# Altium PCB AccelerometerLayout.PcbDoc
Units mil, origin at the board's own origin, x right, y up, seen from the top; angles counter-clockwise.
Board outline 800 x 680 mil, 2 copper layers (Top Layer, Bottom Layer); 9 components, 5 nets, 30 pads, 4 vias.
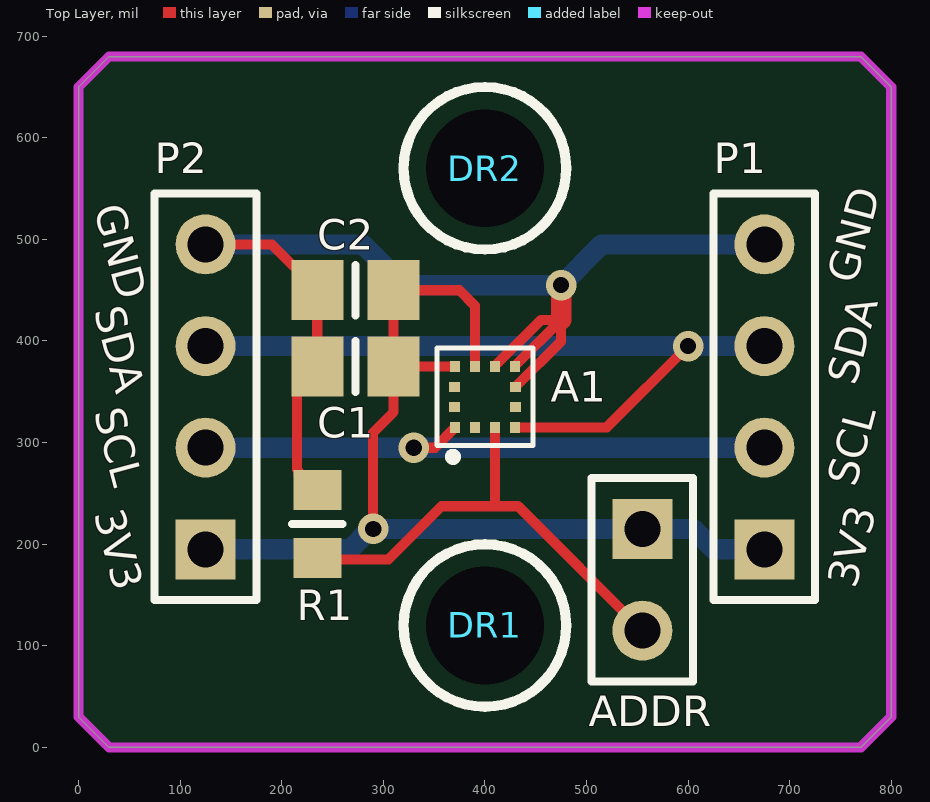
[diagram p0: Top Layer view]
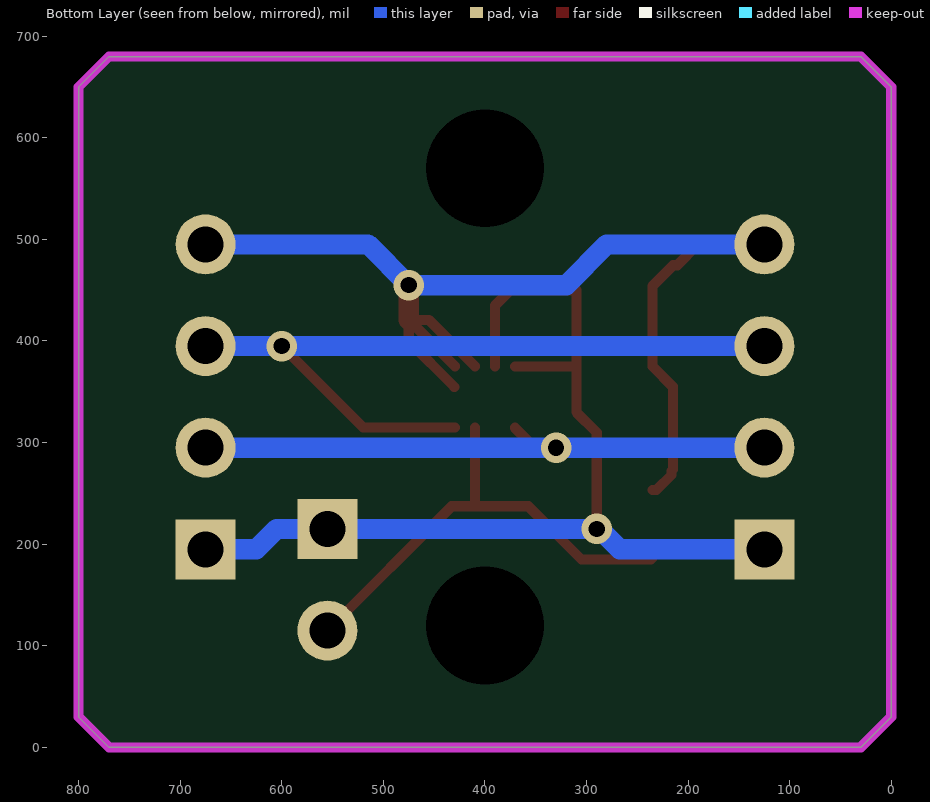
[diagram p1: Bottom Layer view, seen from below]

## Layer stack, top to bottom
Top Solder: solder mask 0.4, Solder Resist, Dk 3.5
Top Layer: signal copper 1.4
Dielectric 1: dielectric 12.6, FR-4, Dk 4.8
Bottom Layer: signal copper 1.4
Bottom Solder: solder mask 0.4, Solder Resist, Dk 3.5

## Board outline
30,0 0,30 0,650 30,680 770,680 800,650 800,30 770,0

## Design rules (kind name [scope] priority, off if disabled: settings)
Clearance "Clearance~Sunstone Circuits" [All] p1: gap=6 ignorepadtopadclearanceinfootprint=FALSE except(0: Arc-Hole Track-Hole SMDPad-Hole THPad-Hole Via-Hole Fill-Hole Poly-Hole Region-Hole Text-Hole) // Sunstone Circuits Minimum Clearance Rule (Double Sided)
HoleSize "HoleSize~Sunstone Circuits" [All] p1: absolutevalues=TRUE maxlimit=251 minlimit=16 maxpercent=80.000 minpercent=20.000 // SSC Hole Size Rule For Single Sided & Double Sided Designs.
HoleSize Testpoint [All] p2: absolutevalues=TRUE maxlimit=100 minlimit=1 maxpercent=80.000 minpercent=20.000
HoleSize TestPointUsage [All] p3: absolutevalues=TRUE maxlimit=100 minlimit=1 maxpercent=80.000 minpercent=20.000
MinimumAnnularRing "MinimumAnnularRing~Sunstone Circuits" [All] p1: minimumring=7 // Sunstone Circuits Minimum Annular Ring (Double Sided)
MinimumSolderMaskSliver [All] p1: minsoldermaskwidth=2
PlaneClearance "PlaneClearance~Sunstone Circuits" [All] p1: clearance=12 // Sunstone Circuits Power Plane Clearance Rule (Double Sided)
PlaneConnect "PlaneConnect~Sunstone Circuits" [All] p1: planeconnectstyle=Relief reliefexpansion=10 reliefentries=4 reliefconductorwidth=8 reliefairgap=10 // Sunstone Circuits Power Plane Connect Rule (Double Sided)
PolygonConnect "PolygonConnect~Sunstone Circuits" [All] p1: connectstyle=Relief reliefconductorwidth=8 reliefentries=4 polygonreliefangle="90 Angle" airgapwidth=10 // Sunstone Circuits Polygon Connect Style (Double Sided)
RoutingVias "RoutingVias~Sunstone Circuits" [All] p1: holewidth=16 width=30 viastyle="Through Hole" minholewidth=16 minwidth=30 maxholewidth=20 maxwidth=40 // Sunstone Circuits Routing Vias Rule (Double Sided)
ShortCircuit "ShortCircuit~Sunstone Circuits" [All] p1: allowed=FALSE // Sunstone Circuits Short Circuit Rule~Do Not Allow (Double Sided)
SilkToSilkClearance [All] p1: silktosilkclearance=1
SilkToSolderMaskClearance [IsPad] p1: minsilkscreentomaskgap=3 clearancetoexposedcopper=TRUE
SolderMaskExpansion "SolderMaskExpansion~Sunstone Circuits" [All] p1: expansion=3 // Sunstone Circuits Solder Mask Expansion Rule (Double Sided)
ViasUnderSMD "ViasUnderSMD~Sunstone Circuits" [All] p1: allowed=FALSE // Sunstone Circuits Vias Under SMD~Do Not Allow (Double Sided)
Width "Width~Sunstone Circuits" [All] p1: maxlimit=100 minlimit=6 preferedwidth=10 // Sunstone Circuits Minimum Width Rule (Double Sided)
23 further rules are at their usual default settings.

## Components (designator, comment, footprint, x,y, rotation, side; value= is the part's Value field where it differs from the comment)
A1 "KX003-1077" *XDCR_KX003-1077 400,345 r90 top
ADDR "90120-0122" HDR1X2 555,215 r270 top (schematic designator P3)
C1 ".1uF" 0805 272.4,375 r0 top
C2 ".1uF" 0805 272.6,450 r0 top
DR1 "4-40 DRILL HOLE" "4_40 DRILL HOLE" 400,120 r0 top
DR2 "4-40 DRILL HOLE" "4_40 DRILL HOLE" 400,570 r0 top
P1 "90120-0124" HDR1X4 675,195 r90 top
P2 "90120-0124" HDR1X4 125,195 r90 top
R1 "10k" 0805_RES_HD 235,220 r270 top (schematic designator R2)

## Footprints (in the part's own frame and the unit in brackets; to place one, negate y for a bottom-side part, rotate by r counter-clockwise, add the part's x,y. Pads: shape width x height; smd on the part's side, far side on the other; paste and mask are expansions set on the pad)
"4_40 DRILL HOLE" [mil]
  round 100 hole 116: 1(0,0)
  silkscreen extent -80,-80 80,80
0805 [mm] "Chip Capacitor; Body 2.0 x 1.2 mm (LxW typ)"
  rect 1.3x1.5 smd: 1(-0.95,0) 2(0.95,0)
  silkscreen extent 0,-0.64 0,0.64, body extent -1,-0.6 1,0.6, height 1.5
0805_RES_HD [mm] "Chip Resistor, 2-Leads, Body 2.00x1.25mm, IPC High Density"
  rect 1x1.2 smd: 1(-0.85,0) 2(0.85,0)
  silkscreen extent 0,-0.64 0,0.64, body extent -1.1,-0.68 1.1,0.67, height 0.65
*XDCR_KX003-1077 [mm]
  rect 0.275x0.25 smd: 1(-0.763,0.75) 2(-0.763,0.25) 3(-0.763,-0.25) 4(-0.763,-0.75) 7(0.763,-0.75) 8(0.763,-0.25) 9(0.763,0.25) 10(0.763,0.75)
  rect 0.25x0.275 smd: 5(-0.25,-0.763) 6(0.25,-0.763) 11(0.25,0.763) 12(-0.25,0.763)
  silkscreen extent -1.6,-1.2 1.22,1.2
HDR1X2 [mm] "Connector; Header; 2 Position"
  rect 1.5x1.5 hole 0.9: 1(0,0)
  round 1.5 hole 0.9: 2(2.54,0)
  silkscreen extent -1.27,-1.27 3.81,1.27
HDR1X4 [mm] "Connector; Header; 4 Position"
  rect 1.5x1.5 hole 0.9: 1(0,0)
  round 1.5 hole 0.9: 2(2.54,0) 3(5.08,0) 4(7.62,0)
  silkscreen extent -1.27,-1.27 8.89,1.27, body extent -1.27,-1.27 8.89,1.27, height 9.32

## Part data
A1: "Accelerometer X, Y, Z Axis ±2g, 4g, 8g, 16g 3.5kHz _X,Y_, 1.8kHz _Z_ 12-LGA _2x2_", Package="VFLGA-12 Rohm Semiconductor", Digi-Key_Part_Number=KX003-1077CT-ND, Digi-Key_Purchase_URL=https://www.digikey.com/product-detail/en/rohm-semiconductor/KX003-1077/KX003-1077CT-ND/9679234?utm_source=snapeda&utm_medium=aggregator&utm_campaign=symbol, MF="Rohm Semiconductor", MP=KX003-1077, SnapEDA_Link=https://www.snapeda.com/parts/KX003-1077/Rohm/view-part/3603894/?ref=snap
ADDR: "MOLEX CONN HEADER 2POS .100\" STR TIN", Manufacturer 1=Molex, Supplier Part Number 1=WM8072-ND, GFUPartNo=90120-0122, Manufacturer Part Number 1=90120-0122, Part Type=THRU, Supplier 1=Digi-Key
C1 C2: library part CL21A475KPFNNNE, ".1, 10%, 50V", Manufacturer 1=Samsung, Supplier Part Number 1=1276-1259-1-ND, GFUPartNo=CL21A475KPFNNNE, Manufacturer Part Number 1=CL21A475KPFNNNE, PackageReference=0805, Part Type=SMT, Supplier 1=Digi-Key
DR1 DR2: library part "4_40 DRILL HOLE", "Mounting hole for 4-40 screw, non-BOM", Manufacturer 1=N/A, GFUPartNo="4_40 DRILL HOLE", Manufacturer Part Number 1=N/A
P1 P2: "CONN HEADER 4POS .100\" STR TIN", Manufacturer 1=Molex, Supplier Part Number 1=WM8074-ND, GFUPartNo=90120-0124, Manufacturer Part Number 1=90120-0124, Part Type=THRU, Supplier 1=Digi-Key
R1: library part RC2012F752CS, "RES 10K OHM 1/8W 5% 0805", Manufacturer 1=Samsung, Supplier Part Number 1=1276-5324-1-ND, GFUPartNo=RC2012F752CS, Manufacturer Part Number 1=RC2012F752CS, Part Type=SMT, Supplier 1=Digi-Key

## Via types
v1: diameter 30, hole 16, Top Layer to Bottom Layer, 4 vias

## Nets (pads, with @x,y where several pads share a name; then routed paths per layer and width w, separated by ;. In a path a pad name is that pad's centre, name@x,y a point inside that pad or via, vN(x,y) a via of type N, cw(c..) or ccw(c..) an arc to the next point about the centre after c; other vN are vias at no path point)
3V3: A1.9 A1.10 ADDR.1 C1.2 C2.2 P1.1 P2.1 | length 1020.5
  Top Layer w10: v1(290,215) 290,310 310,330 310,374.8 C1.2 ; A1.10 C1.2 ; A1.9 390.16,434.84 375,450 C2.2 310,375.2 C1.2 ; P1.1@670,195 P1.1@672.5,197.5
  Bottom Layer w20: P2.1 267.29,195 287.29,215 v1(290,215) ADDR.1 605,215 625,195 P1.1
GND: A1.6 A1.7 A1.8 C1.1 C2.1 P1.4 P2.4 R1.1 | length 1201.3
  Top Layer w10: P2.4 190.2,495 210.67,474.53 214.61,474.53 235.2,453.94 C2.1 235,449.8 C1.1 215,355 215,273.46 216.38,272.09 216.38,268.15 231.06,253.46 R1.1 ; A1.8 409.84,375.35 455.31,420.83 475,420.83 ; A1.7 429.53,375.35 475,420.83 ; A1.6 430.35,354.84 430.43,354.92 430.43,355.26 475,399.82 475,420.83
  Top Layer w20: 475,420.83 v1(475,455) ; P1.4 P1.4@677.5,497.5
  Bottom Layer w20: P2.4 280,495 320,455 v1(475,455) 515,495 P1.4
NetA1_3: A1.3 ADDR.2 R1.2 | length 470.6
  Top Layer w10: R1.2 236.54,185 305,185 357.34,237.34 409.84,237.34 ; A1.3 409.84,237.34 ; ADDR.2 432.66,237.34 409.84,237.34
SCL: A1.1 P1.2 P2.2 | length 598.9
  Top Layer w10: v1(330,295) 350.83,295 370.47,314.65 A1.1
  Bottom Layer w20: P2.2 v1(330,295) 600,295 P1.2
SDA: A1.4 P1.3 P2.3 | length 753.6
  Top Layer w10: A1.4 519.98,314.98 v1(600,395)
  Bottom Layer w20: P2.3 v1(600,395) P1.3
pads on no net: A1.2 A1.5 A1.11 A1.12 DR1.1 DR2.1

## Keep-outs
Keep-Out Layer:
  the board outline again, w10

## Silkscreen, mask and mechanical layers (free items; w line width, h text height)
Top Overlay:
  text "GND" at 15,530 h30 r285
  text "GND" at 765,455 h30 r75
  text "SDA" at 15,430 h30 r285
  text "SDA" at 765,355 h30 r75
  text "SCL" at 15,330 h30 r285
  text "SCL" at 765,255 h30 r75
  text "3V3" at 15,230 h30 r285
  text "3V3" at 765,155 h30 r75